# Allegro board DCPOWER2303.brd
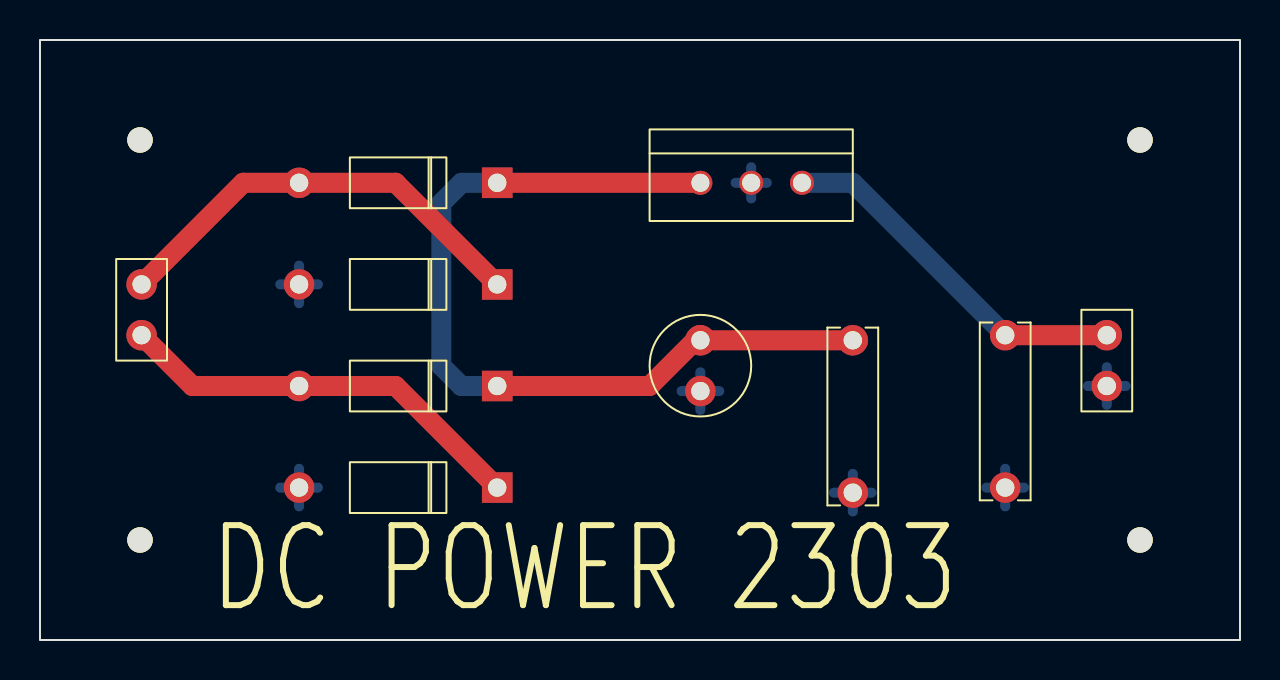
[diagram p0: board, top side]
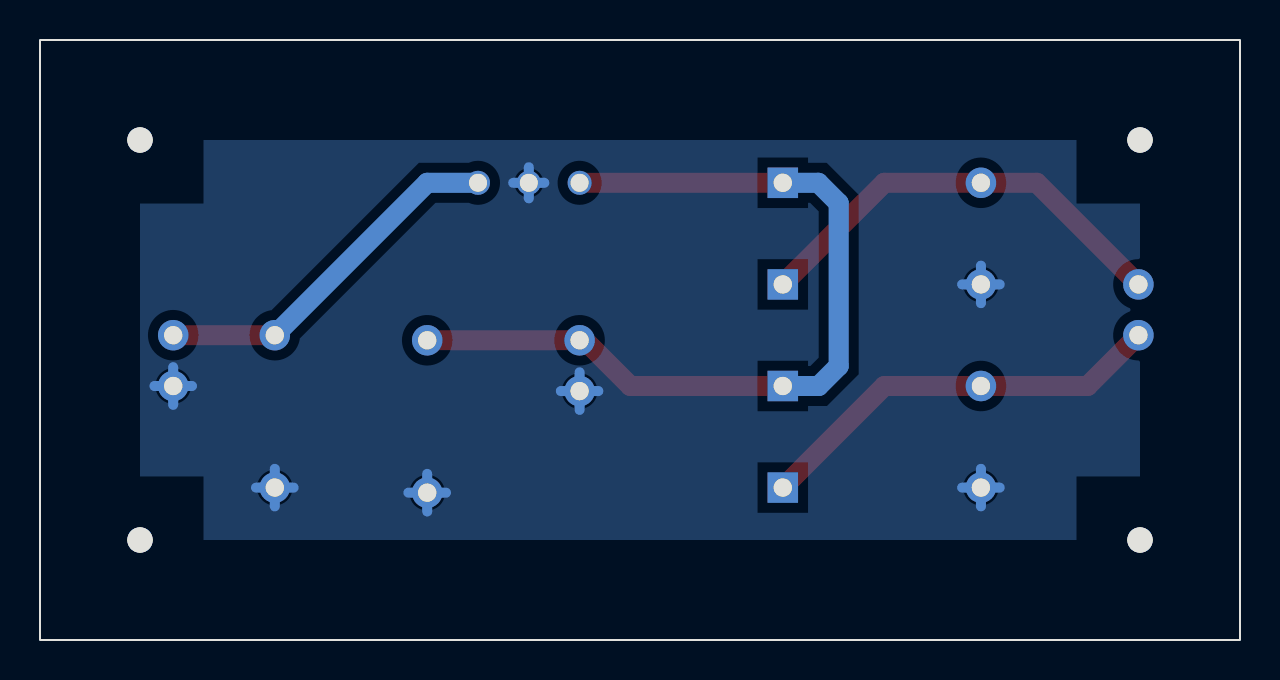
[diagram p1: board, bottom side, seen from below]

Outline 60 x 30 mm; copper layers: TOP, BOTTOM. Coordinates in mm from the lower left corner of the outline.
Outline path: rectangle 0,0 60,30

## Design rules (mm)
nets with their own width: min track width 2; nets GND

## Placement (name value [footprint] x y rotation side)
C1  470uF  [CAP196]  33.02 14.99 180 top
C2  0.33uF  [CAP300]  40.64 14.99 270 top
C3  0.1uF  [CAP300]  48.26 15.24 270 top
D1  1N4001  [DO41]  22.86 17.78 90 top
D2  1N4001  [DO41]  22.86 22.86 90 top
D3  1N4001  [DO41]  22.86 7.62 90 top
D4  1N4001  [DO41]  22.86 12.7 90 top
J1  AC 6V  [JUMPER2]  5.08 17.78 270 top
J2  DC OUT  [JUMPER2]  53.34 15.24 270 top
NOREF  -  []  0 0 90 top
NOREF#2  -  [unnamed#2]  5 25 0 top
NOREF#3  -  []  55 31 0 top
NOREF#4  -  []  61 0 90 top
NOREF#5  -  []  -1 25 90 top
NOREF#6  -  []  0 30 0 top
NOREF#7  -  [unnamed#2]  55 5 0 top
NOREF#8  -  []  -1 0 90 top
NOREF#9  -  []  0 31 0 top
NOREF#10  -  [unnamed#2]  55 25 0 top
NOREF#11  -  []  -1 5 90 top
NOREF#12  -  [unnamed#2]  5 5 0 top
U1  LM7805/TO  [TO220]  35.56 22.86 0 top

## Library data of the parts
C1 = CAP POL: Tolerance: ***; User Part Number: ***
C2 C3 = CAP NP: Tolerance: ***; User Part Number: ***
D1-D4 = DIODE
J1 J2 = CON2: User Part Number: ***
U1 = LM7805/TO_9

## Footprints (pads in the part's own frame, mm; a bottom-side part is the same pattern mirrored in y, then rotated)
CAP196
  round 1.524 hole 0.914: 1(0,0) 2(0,2.54)
CAP300
  round 1.524 hole 0.914: 1(0,0) 2(7.62,0)
DO41
  rect 1.524x1.524 hole 0.914: 1(0,0)
  round 1.524 hole 0.914: 2(0,9.906)
JUMPER2
  round 1.524 hole 0.914: 1(0,0) 2(2.54,0)
TO220
  round 1.2 hole 0.9: 1(-2.54,0) 2(0,0) 3(2.54,0)
unnamed#2
  round 1.27 hole 3 unplated: (0,0)

## Nets
GND: C1.2 C2.2 C3.2 D1.2(A) D3.2(A) J2.2 U1.2
N06398: C1.1 C2.1 D2.1(K) D4.1(K) U1.1(VIN)
N06454: D3.1(K) D4.2(A) J1.2
N06470: D1.1(K) D2.2(A) J1.1
N06510: C3.1 J2.1 U1.3(VOUT)

## Routing (per net, layer and track width the routed paths; a pad name or vN(x,y) marks a point on that pad's centre or on a via; arc(x,y) is an arc through that point)
GND: length 25.7
  BOTTOM w0.5: J2.2 53.34,13.64 ; J2.2 54.28,12.7 ; J2.2 52.4,12.7 ; J2.2 53.34,11.76 ; C1.2 33.96,12.45 ; C1.2 32.08,12.45 ; C1.2 33.02,11.51 ; C1.2 33.02,13.39 ; 47.32,7.62 C3.2 ; C3.2 48.26,8.56 ; C3.2 49.2,7.62 ; C3.2 48.26,6.68 ; U1.2 35.56,23.64 ; U1.2 34.78,22.86 ; U1.2 35.56,22.08 ; U1.2 36.34,22.86 ; D3.2 13.89,7.62 ; D3.2 12.01,7.62 ; D3.2 12.95,8.56 ; D3.2 12.95,6.68 ; 40.64,6.43 C2.2 ; C2.2 39.7,7.37 ; C2.2 41.58,7.37 ; C2.2 40.64,8.31 ; D1.2 13.89,17.78 ; D1.2 12.01,17.78 ; D1.2 12.95,16.84 ; D1.2 12.95,18.72
N06398: length 43.8
  TOP w1: C2.1 C1.1 33.02,15.24 30.48,12.7 D4.1 ; D2.1 U1.1
  BOTTOM w1: D2.1 21.08,22.86 20.07,21.84 20.07,13.7 21.07,12.7 D4.1
N06454: length 20.9
  TOP w1: D3.1 17.78,12.7 D4.2 7.62,12.7 J1.2
N06470: length 22
  TOP w1: J1.1 10.16,22.86 D2.2 17.78,22.86 D1.1
N06510: length 18.4
  TOP w1: C3.1 J2.1
  BOTTOM w1: C3.1 40.64,22.86 U1.3

## Copper pours and planes (outline as drawn; the poured copper is in the pictures)
GND on BOTTOM: 55,5 5,5 5,25 55,25

## Text on the board
Ref Des/Silkscreen Top: DC POWER 2303
DIMENSION: FIGURE | SIZE | 0.8999 | 0.9144 | 3.0 | DRILL CHART: TOP to BOTTOM | ALL UNITS ARE IN MILLIMETERS | PLATED | NON-PLATED | QTY | 3 | 18 | 4
